# Altium PCB bldc_robot_main_adapter_board.PcbDoc
Units mm, origin at the board's own origin, x right, y up, seen from the top; angles counter-clockwise.
Board outline 100 x 40 mm, 2 copper layers (Top Layer, Bottom Layer), stack 1.571 mm thick; 51 components, 41 nets, 502 pads, 269 vias.
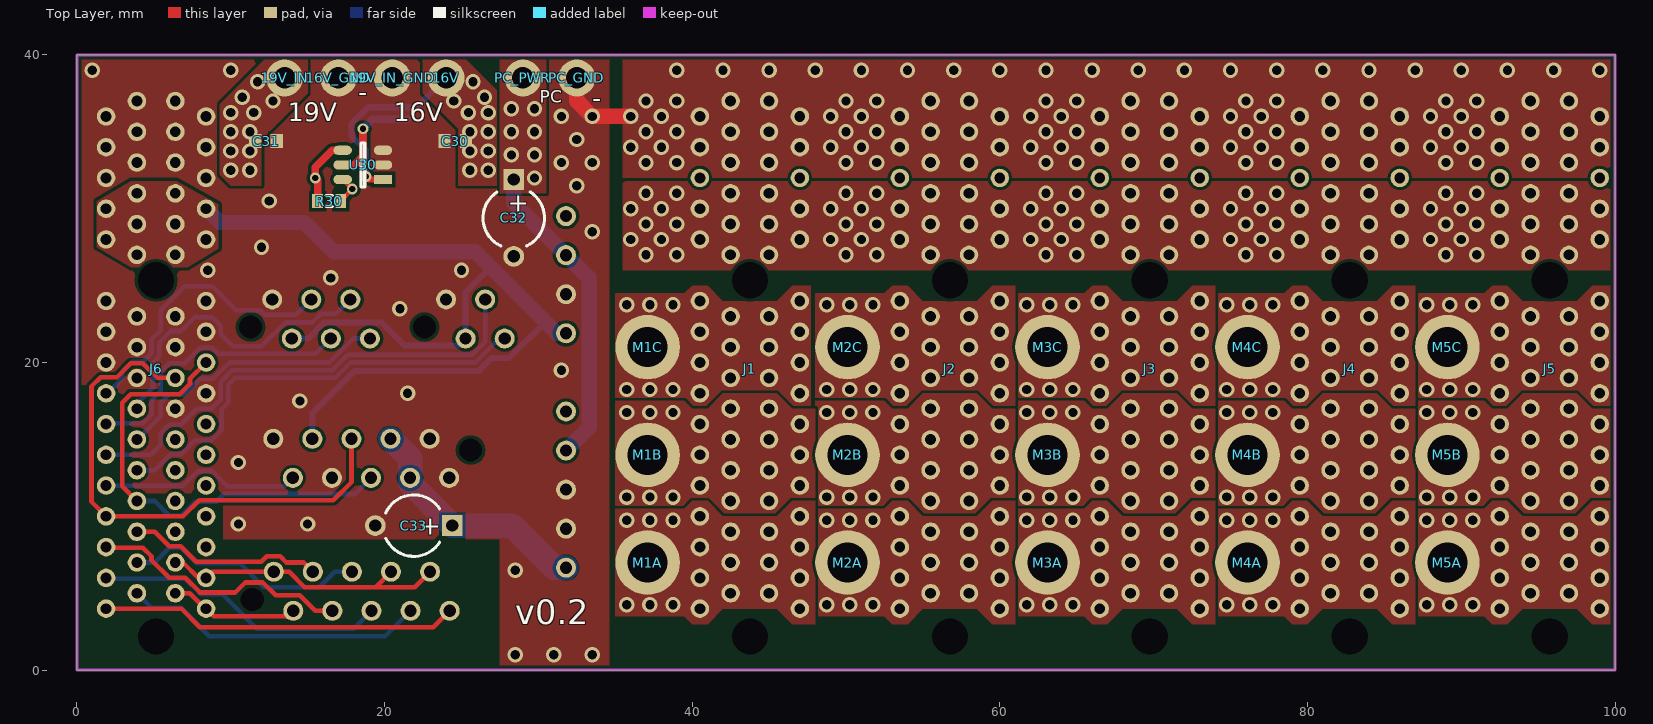
[diagram p0: Top Layer view]
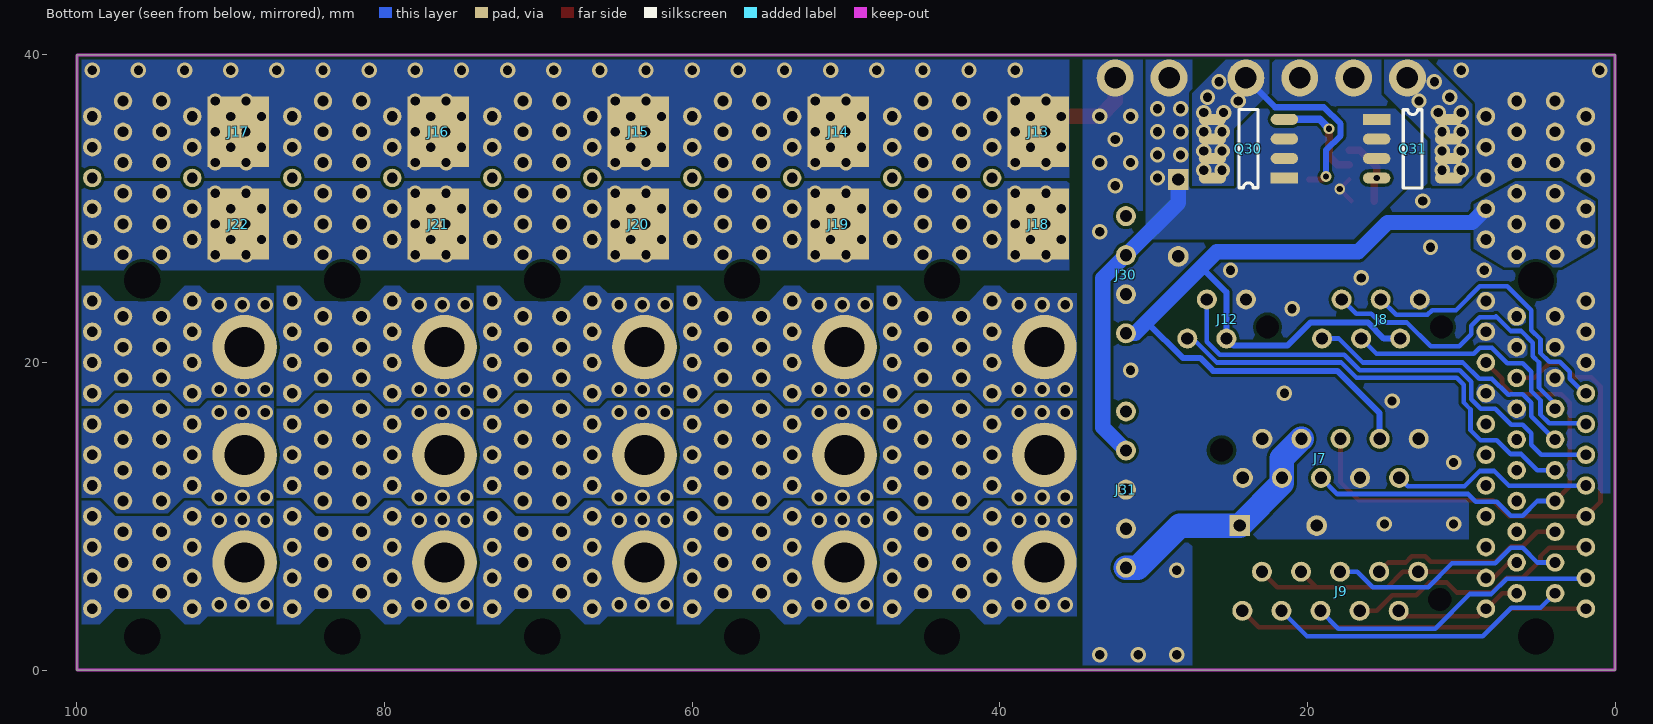
[diagram p1: Bottom Layer view, seen from below]
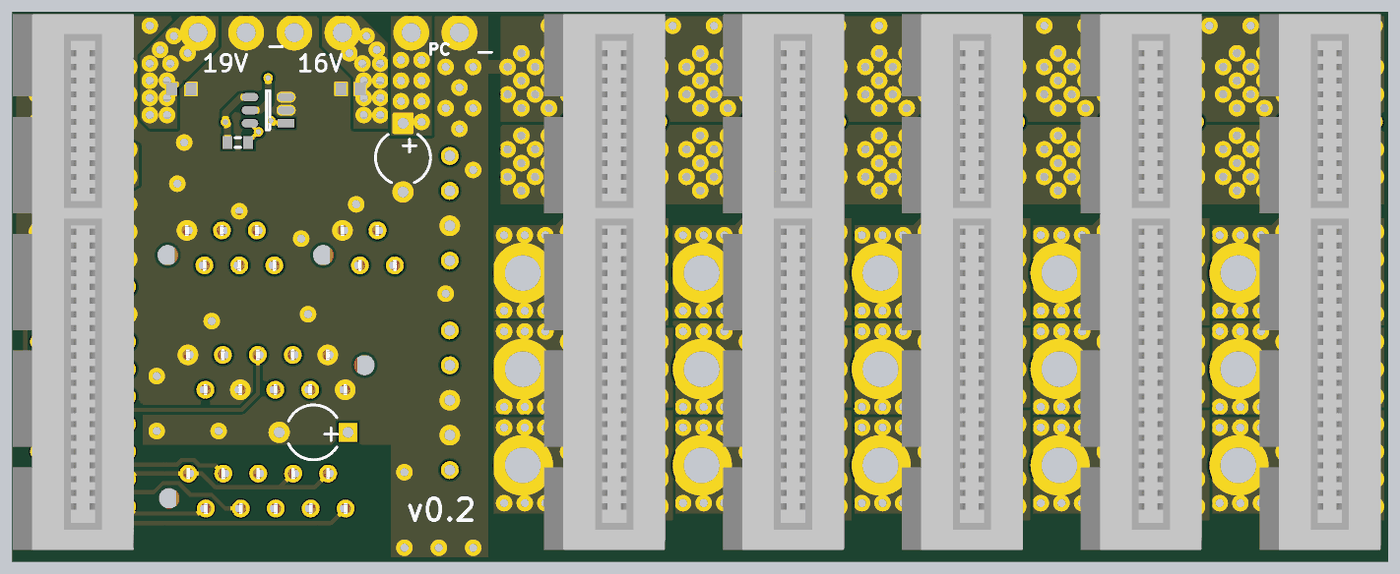
[diagram p2: 3D render of the assembled board from above, using the file's embedded part models]
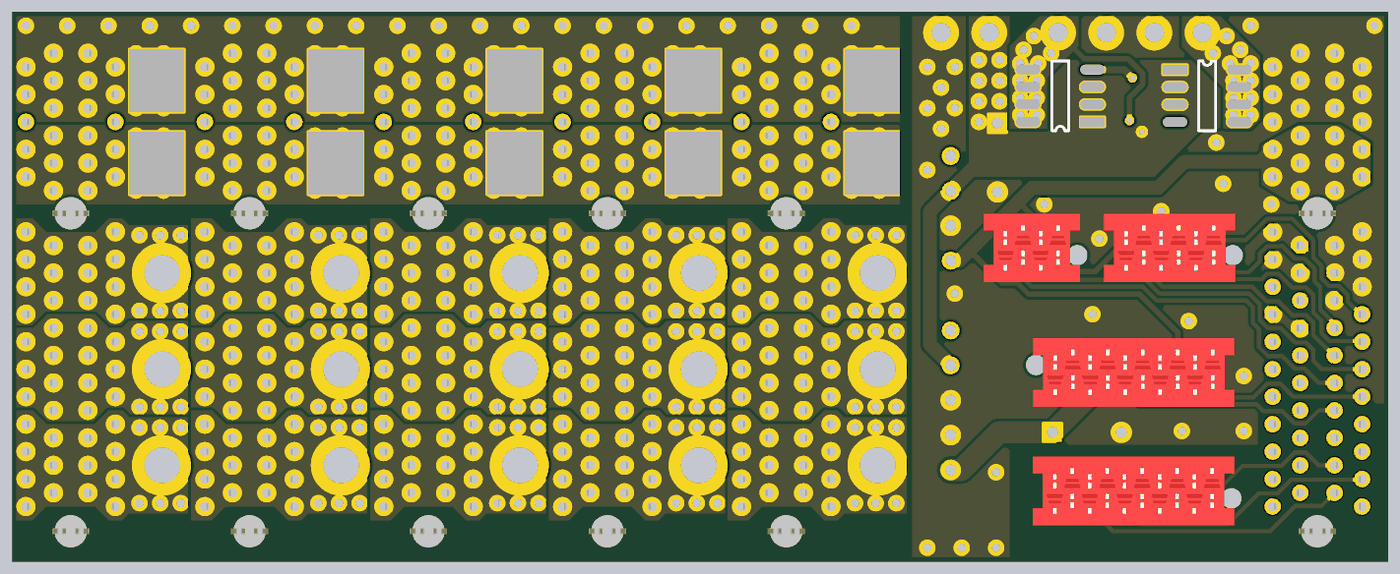
[diagram p3: 3D render of the assembled board from below, using the file's embedded part models]

## Layer stack, top to bottom
Top Solder: solder mask 0.0102, Solder Resist, Dk 3.5
Top Layer: signal copper 0.0356
Dielectric 1: dielectric 1.5, FR-4, Dk 4.8
Bottom Layer: signal copper 0.0356
Bottom Solder: solder mask 0.0102, Solder Resist, Dk 3.5

## Board outline
0,0 100,0 100,40 0,40

## Design rules (kind name [scope] priority, off if disabled: settings)
Clearance [All] p1: gap=0.2
Clearance ClearanceKeepOut [All vs OnLayer('Keep-Out Layer')] p2: gap=0.1
ComponentClearance [All] p1: gap=0.2 collisioncheckmode=3 verticalgap=0.2 showdistances=FALSE
HoleSize [All] p1: absolutevalues=TRUE maxlimit=5 minlimit=0.3 maxpercent=80.000 minpercent=20.000
PolygonConnect [All] p1: connectstyle=Direct reliefconductorwidth=0.254 reliefentries=4 polygonreliefangle="90 Angle" airgapwidth=0.254
RoomDefinition bldc_robot_main_adapter_board [InComponentClass('bldc_robot_main_adapter_board')] p1: confinementstyle=ConfineIn formatcopy=TRUE lockcomponents=FALSE outline 0,0 100,0 100,40 0,40
RoutingVias [All] p1: holewidth=0.5 width=0.8 viastyle="Through Hole" minholewidth=0.3 minwidth=0.7 maxholewidth=2 maxwidth=3
SolderMaskExpansion SolderMaskExpansionVia [IsVia] p1: expansion=-1
SolderMaskExpansion [All] p2: expansion=0.1
Width [All] p1: maxlimit=5 minlimit=0.2 preferedwidth=0.3
28 further rules are at their usual default settings.

## Components (designator, comment, footprint, x,y, rotation, side; value= is the part's Value field where it differs from the comment)
16V "HEADER-1" POWER-VIA 24,38.5 r270 top
16V_GND "HEADER-1" POWER-VIA 17,38.5 r0 top
19V_IN "HEADER-1" POWER-VIA 13.5,38.5 r0 top
19V_IN_GND "HEADER-1" POWER-VIA 20.5,38.5 r0 top
C30 "100nF" 1608[0603] 24.6,34.4 r180 top
C31 "100nF" 1608[0603] 12.3,34.4 r0 top
C32 "470uF" CAPR5-4X5 28.4,29.4 r270 top
C33 "470uF" CAPR5-4X5 21.9,9.4 r180 top
J1 "PCI-EXPRESS-X4" PCI-EXPRESS-X4-SOCKET 45,37 r270 top
J2 "PCI-EXPRESS-X4" PCI-EXPRESS-X4-SOCKET 58,37 r270 top
J3 "PCI-EXPRESS-X4" PCI-EXPRESS-X4-SOCKET 71,37 r270 top
J4 "PCI-EXPRESS-X4" PCI-EXPRESS-X4-SOCKET 84,37 r270 top
J5 "PCI-EXPRESS-X4" PCI-EXPRESS-X4-SOCKET 97,37 r270 top
J6 "PCI-EXPRESS-X4" PCI-EXPRESS-X4-SOCKET 6.4,37 r270 top
J7 "DRIBBLER" MICRO-MATCH-10 24.2,12.5 r0 bottom
J8 "IMU" MICRO-MATCH-6 12.7,24.1 r180 bottom
J9 "COIL" MICRO-MATCH-10 12.8,6.4 r180 bottom
J12 "ERF" MICRO-MATCH-4 24,24.1 r180 bottom
J13 "GND_PAD" POWER-PAD 37.5,35 r180 bottom
J14 "GND_PAD" POWER-PAD 50.5,35 r180 bottom
J15 "GND_PAD" POWER-PAD 63.5,35 r180 bottom
J16 "GND_PAD" POWER-PAD 76.5,35 r180 bottom
J17 "GND_PAD" POWER-PAD 89.5,35 r180 bottom
J18 "16V_PAD" POWER-PAD 37.5,29 r180 bottom
J19 "16V_PAD" POWER-PAD 50.5,29 r180 bottom
J20 "16V_PAD" POWER-PAD 63.5,29 r180 bottom
J21 "16V_PAD" POWER-PAD 76.5,29 r180 bottom
J22 "16V_PAD" POWER-PAD 89.5,29 r180 bottom
J30 "D24V5F5" PIN-HEADER-4 31.8,29.52 r270 bottom
J31 "D24V25F7" PIN-HEADER-5 31.8,16.82 r270 bottom
M1A "HEADER-1" 2MM-BULLET-VIA 37.1,7 r180 top
M1B "HEADER-1" 2MM-BULLET-VIA 37.1,14 r180 top
M1C "HEADER-1" 2MM-BULLET-VIA 37.1,21 r180 top
M2A "HEADER-1" 2MM-BULLET-VIA 50.1,7 r180 top
M2B "HEADER-1" 2MM-BULLET-VIA 50.1,14 r180 top
M2C "HEADER-1" 2MM-BULLET-VIA 50.1,21 r180 top
M3A "HEADER-1" 2MM-BULLET-VIA 63.1,7 r180 top
M3B "HEADER-1" 2MM-BULLET-VIA 63.1,14 r180 top
M3C "HEADER-1" 2MM-BULLET-VIA 63.1,21 r180 top
M4A "HEADER-1" 2MM-BULLET-VIA 76.1,7 r180 top
M4B "HEADER-1" 2MM-BULLET-VIA 76.1,14 r180 top
M4C "HEADER-1" 2MM-BULLET-VIA 76.1,21 r180 top
M5A "HEADER-1" 2MM-BULLET-VIA 89.1,7 r180 top
M5B "HEADER-1" 2MM-BULLET-VIA 89.1,14 r180 top
M5C "HEADER-1" 2MM-BULLET-VIA 89.1,21 r180 top
PC_GND "HEADER-1" POWER-VIA 32.5,38.5 r90 top
PC_PWR "HEADER-1" POWER-VIA 29,38.5 r90 top
Q30 "PMOS" SO8 21.5,32 r0 bottom
Q31 "PMOS" SO8 15.5,35.8 r180 bottom
R30 "470k" J1-0603 16.4,30.5 r0 top
U30 "LTC4412" TSOT-23-6 19.9,31.9 r180 top

## Footprints (in the part's own frame and the unit in brackets; to place one, negate y for a bottom-side part, rotate by r counter-clockwise, add the part's x,y. Pads: shape width x height; smd on the part's side, far side on the other; paste and mask are expansions set on the pad)
2MM-BULLET-VIA [mm]
  round 4.2 hole 2.6: 1(0,0)
1608[0603] [mm] "Chip Capacitor, Body 1.6x0.8mm, IPC High Density"
  rect 0.8x0.9 smd: 1(-0.7,0) 2(0.7,0)
  body extent -0.87,-0.48 0.87,0.48, height 1.3
CAPR5-4X5 [mm] "Capacitor; 2 Leads"
  rect 1.35x1.35 hole 0.8: 1(-2.5,0)
  round 1.35 hole 0.8: 2(2.5,0)
  silkscreen extent -1.69,-2 1.82,2
J1-0603 [mm] "Chip Resistor, Body 1.6x0.8mm, IPC High Density"
  rect 0.7x0.9 smd: 1(-0.75,0) 2(0.75,0)
  silkscreen extent -0.2,-0.35 0.2,0.35, body extent -0.85,-0.48 0.85,0.48, height 0.9
MICRO-MATCH-4 [mm]
  round 1.3 hole 0.8: 1(0,0) 2(-1.27,-2.54) 3(-2.54,0) 4(-3.81,-2.54)
  round 0 hole 1.5 unplated: drill(1.4,-1.8)
  body extent -5.41,-3.77 1.6,1.23, height 4
MICRO-MATCH-6 [mm]
  round 1.3 hole 0.8: 1(0,0) 2(-1.27,-2.54) 3(-2.54,0) 4(-3.81,-2.54) 5(-5.08,0) 6(-6.35,-2.54)
  round 0 hole 1.5 unplated: drill(1.4,-1.8)
  body extent -7.95,-3.77 1.6,1.23, height 4
MICRO-MATCH-10 [mm]
  round 1.3 hole 0.8: 1(0,0) 2(-1.27,-2.54) 3(-2.54,0) 4(-3.81,-2.54) 5(-5.08,0) 6(-6.35,-2.54) 7(-7.62,0) 8(-8.89,-2.54) 9(-10.16,0) 10(-11.43,-2.54)
  round 0 hole 1.5 unplated: drill(1.4,-1.8)
  body extent -13.03,-3.77 1.6,1.23, height 4
PCI-EXPRESS-X4-SOCKET [mm]
  round 0 hole 2.35 unplated: 0(11.65,-1.25) 1(34.8,-1.25)
  round 1.2 hole 0.7: A1(0,0) A2(1,2) A3(2,0) A4(3,2) A5(4,0) A6(5,2) A7(6,0) A8(7,2) A9(8,0) A10(9,2) A11(10,0) A12(13,2) A13(14,0) A14(15,2) A15(16,0) A16(17,2) A17(18,0) A18(19,2) A19(20,0) A20(21,2) A21(22,0) A22(23,2) A23(24,0) A24(25,2) A25(26,0) A26(27,2) A27(28,0) A28(29,2) A29(30,0) A30(31,2) A31(32,0) A32(33,2) B1(0,-2.5) B2(1,-4.5) B3(2,-2.5) B4(3,-4.5) B5(4,-2.5) B6(5,-4.5) B7(6,-2.5) B8(7,-4.5) B9(8,-2.5) B10(9,-4.5) B11(10,-2.5) B12(13,-4.5) B13(14,-2.5) B14(15,-4.5) B15(16,-2.5) B16(17,-4.5) B17(18,-2.5) B18(19,-4.5) B19(20,-2.5) B20(21,-4.5) B21(22,-2.5) B22(23,-4.5) B23(24,-2.5) B24(25,-4.5) B25(26,-2.5) B26(27,-4.5) B27(28,-2.5) B28(29,-4.5) B29(30,-2.5) B30(31,-4.5) B31(32,-2.5) B32(33,-4.5)
  body extent -2.85,-6.35 36.15,2.45, height 11.01
PIN-HEADER-4 [mm]
  round 1.3 hole 0.8: 1(0,0) 2(2.54,0) 3(5.08,0) 4(7.62,0)
PIN-HEADER-5 [mm]
  round 1.3 hole 0.8: 1(0,0) 2(2.54,0) 3(5.08,0) 4(7.62,0) 5(10.16,0)
POWER-PAD [mm]
  rect 4x4.6 smd: 1(0,0)
POWER-VIA [mm]
  round 2.4 hole 1.4: 1(0,0)
SO8 [mm]
  rect 1.78x0.72 smd: 1(0,0)
  oval 1.78x0.72 smd: 2(0,-1.27) 3(0,-2.54) 4(0,-3.81) 5(4.68,-3.81) 6(4.68,-2.54) 7(4.68,-1.27) 8(4.68,0)
  silkscreen extent 1.72,-4.44 2.96,0.64
TSOT-23-6 [mm]
  rect 1.2x0.6 smd: 1(0,0)
  oval 1.2x0.6 smd: 2(0,-0.95) 3(0,-1.9) 4(2.62,-1.9) 5(2.62,-0.95) 6(2.62,0)
  silkscreen extent 1.19,-2.38 1.43,0.48

## Part data
C30 C31: library part "Cap Semi", "Capacitor (Semiconductor SIM Model)"
C32 C33: library part Cap2, "Capacitor"
J7 J9: library part HEADER-10
J8: library part HEADER-6
J12 J30: library part HEADER-4
J13 J14 J15 J16 J17 J18 J19 J20 J21 J22: library part HEADER-1
J31: library part HEADER-5
R30: library part Res3, "Resistor"

## Via types
v1: diameter 1, hole 0.6, Top Layer to Bottom Layer, 265 vias
v2: diameter 0.7, hole 0.4, Top Layer to Bottom Layer, 4 vias

## Nets (pads, with @x,y where several pads share a name; then routed paths per layer and width w, separated by ;. In a path a pad name is that pad's centre, name@x,y a point inside that pad or via, vN(x,y) a via of type N, cw(c..) or ccw(c..) an arc to the next point about the centre after c; other vN are vias at no path point)
5V: J6.A7 J6.A8 J6.A9 J6.A10 J6.A11 J6.B7 J6.B8 J6.B9 J6.B10 J6.B11 J7.8 J8.2 J12.2 J30.4 | length 63.9
  Bottom Layer w0.4: J8.2 15.025,21.56 16.075,22.61 19.8,22.61 21.31,21.1 24.81,21.1 J12.2 25.27,24.57 26.9,26.2 ; J7.8 15.31,16.71 18.05,19.45 26.128,19.45 26.978,20.3 28.1,20.3 30.4,22.6 30.5,22.6
  Bottom Layer w1: J6.A8 9.3,29.1 14.8,29.1 16.7,27.2 25.9,27.2 26.9,26.2 30.5,22.6 31.2,21.9 J30.4
5V_COIL: J6.A31 J6.A32 J9.2 | length 8.4
  Top Layer w0.3: J6.A31 7.349,5 8.349,4 J6.A32 8.9,3.5 13.71,3.5 J9.2
7.5V: C33.1 J7.3 J7.4 J31.5 | length 15.8
  Bottom Layer w1.6: J7.4 21.66,13.77 J7.3 21.66,12.14 C33.1 28.3,9.4 31.04,6.66 J31.5
16V: J1.A7 J1.A8 J1.A9 J1.A10 J1.A11 J1.B7 J1.B8 J1.B9 J1.B10 J1.B11 J2.A7 J2.A8 J2.A9 J2.A10 J2.A11 J2.B7 J2.B8 J2.B9 J2.B10 J2.B11 J3.A7 J3.A8 J3.A9 J3.A10 J3.A11 J3.B7 J3.B8 J3.B9 J3.B10 J3.B11 J4.A7 J4.A8 J4.A9 J4.A10 J4.A11 J4.B7 J4.B8 J4.B9 J4.B10 J4.B11 J5.A7 J5.A8 J5.A9 J5.A10 J5.A11 J5.B7 J5.B8 J5.B9 J5.B10 J5.B11 J18.1 J19.1 J20.1 J21.1 J22.1
  other v1: 37,27 39,27 50,27 52,27 63,27 65,27 76,27 78,27 89,27 91,27 36,28 38,28 49,28 51,28 62,28 64,28 75,28 77,28 88,28 90,28 37,29 39,29 50,29 52,29 63,29 65,29 76,29 78,29 89,29 91,29 36,30 38,30 49,30 51,30 62,30 64,30 75,30 77,30 88,30 90,30 37,31 39,31 50,31 52,31 63,31 65,31 76,31 78,31 89,31 91,31
16V_PC: C32.1 J30.2 J31.2 PC_PWR.1 Q30.1 Q30.2 Q30.3 Q31.1 Q31.2 Q31.3 R30.2 U30.6 | length 22.2
  Top Layer w0.3: R30.2 17.15,30.53 v2(17.9,31.28) U30.6
  Bottom Layer w1: C32.1 28.4,30.38 J30.2 33.3,25.48 33.3,15.78 J31.2
  other v1: 29.75,32 28.25,33.5 29.75,33.5 28.25,35 29.75,35 28.25,36.5 29.75,36.5
BALL_SENS: J6.B24 J7.9 | length 13.2
  Bottom Layer w0.3: J6.B24 6.9,12 7.85,12.95 8.793,12.95 9.794,11.95 13.49,11.95 J7.9
CHARGE: J6.B29 J9.5 | length 15.8
  Bottom Layer w0.3: J6.B29 5.056,7 6.006,7.95 6.793,7.95 7.793,6.95 10.606,6.95 12.156,5.4 15.754,5.4 16.754,6.4 J9.5
CS: J6.B21 J8.6 | length 18.4
  Bottom Layer w0.3: J6.B21 3.951,15 5.45,16.499 5.45,17.394 6.006,17.95 6.793,17.95 6.843,17.9 6.956,17.9 8.006,18.95 8.843,18.95 9.893,20 16.4,20 17.96,21.56 J8.6
DONE: J6.B30 J9.6 | length 19.1
  Bottom Layer w0.3: J6.B30 1.95,5.95 7.05,5.95 8.05,4.95 9.45,4.95 11.7,2.7 17.99,2.7 J9.6
GND: 16V_GND.1 19V_IN_GND.1 C30.2 C31.2 C32.2 C33.2 J1.A1 J1.A2 J1.A3 J1.A4 J1.A5 J1.B1 J1.B2 J1.B3 J1.B4 J1.B5 J2.A1 J2.A2 J2.A3 J2.A4 J2.A5 J2.B1 J2.B2 J2.B3 J2.B4 J2.B5 J3.A1 J3.A2 J3.A3 J3.A4 J3.A5 J3.B1 J3.B2 J3.B3 J3.B4 J3.B5 J4.A1 J4.A2 J4.A3 J4.A4 J4.A5 J4.B1 J4.B2 J4.B3 J4.B4 J4.B5 J5.A1 J5.A2 J5.A3 J5.A4 J5.A5 J5.B1 J5.B2 J5.B3 J5.B4 J5.B5 J6.A1 J6.A2 J6.A3 J6.A4 J6.A5 J6.A6 J6.A12 J6.A13 J6.A14 J6.A15 J6.A18 J6.A19 J6.B1 J6.B2 J6.B3 J6.B4 J6.B5 J6.B6 J6.B12 J6.B13 J6.B14 J6.B15 J6.B16 J6.B17 J7.1 J7.2 J7.7 J7.10 J8.1 J12.1 J13.1 J14.1 J15.1 J16.1 J17.1 J30.3 J31.3 J31.4 PC_GND.1 U30.2 U30.3 | length 5.4
  Top Layer w1: PC_GND.1 32.5,37 v1(33.5,36) v1(36,36)
  other v1: 28.5,1 31,1 33.5,1 28.5,6.5 10.5,9.5 15,9.5 10.5,13.5 14.5,17.5 21.5,18 31.5,19.5 21,23.5 16.5,25.5 8.5,26 25,26 12,27.5 33.5,28.5 12.5,30.5 32.5,31.5 31.5,33 33.5,33 37,33 39,33 50,33 52,33 63,33 65,33 76,33 78,33 89,33 91,33 36,34 38,34 49,34 51,34 62,34 64,34 75,34 77,34 88,34 90,34 32.5,34.5 37,35 39,35 50,35 52,35 63,35 65,35 76,35 78,35 89,35 91,35 31.5,36 38,36 49,36 51,36 62,36 64,36 75,36 77,36 88,36 90,36 37,37 39,37 50,37 52,37 63,37 65,37 76,37 78,37 89,37 91,37 1,39 10,39 39,39 42,39 45,39 48,39 51,39 54,39 57,39 60,39 63,39 66,39 69,39 72,39 75,39 78,39 81,39 84,39 87,39 90,39 93,39 96,39 99,39
GND_COIL: J6.A29 J6.A30 J9.1 J9.7 J9.9 | length 19.9
  Top Layer w0.3: J6.A29 6.9,7 7.9,6 J6.A30 8.8,6.4 J9.1 ; J9.1@12.454,6.054 J9.1 ; J9.7 19.42,5.4 ; J9.9 21.96,5.4 19.42,5.4 ; J9.1 13.8,6.4 14.8,5.4 19.42,5.4
KICK1: J6.B27 J9.3 | length 12.8
  Top Layer w0.3: J6.B27 5.056,9 6.006,8.05 6.75,8.05 7.75,7.05 11.986,7.05 12.336,7.4 13.214,7.4 13.614,7 14.74,7 J9.3
KICK2: J6.B28 J9.4 | length 17.1
  Top Layer w0.3: J6.B28 1.95,7.95 4.293,7.95 4.85,7.394 4.85,7.15 6,6 7.056,6 8.006,5.05 10.294,5.05 10.944,5.7 12.086,5.7 12.926,4.86 14.484,4.86 15.484,3.86 J9.4
M1A: J1.A26 J1.A27 J1.A28 J1.A29 J1.A30 J1.A31 J1.A32 J1.B26 J1.B27 J1.B28 J1.B29 J1.B30 J1.B31 J1.B32 M1A.1
  other v1: 35.75,4.25 37.25,4.25 38.75,4.25 35.75,9.75 37.25,9.75 38.75,9.75
M1B: J1.A19 J1.A20 J1.A21 J1.A22 J1.A23 J1.A24 J1.A25 J1.B19 J1.B20 J1.B21 J1.B22 J1.B23 J1.B24 J1.B25 M1B.1
  other v1: 35.75,11.25 37.25,11.25 38.75,11.25 35.75,16.75 37.25,16.75 38.75,16.75
M1C: J1.A12 J1.A13 J1.A14 J1.A15 J1.A16 J1.A17 J1.A18 J1.B12 J1.B13 J1.B14 J1.B15 J1.B16 J1.B17 J1.B18 M1C.1
  other v1: 35.75,18.25 37.25,18.25 38.75,18.25 35.75,23.75 37.25,23.75 38.75,23.75
M2A: J2.A26 J2.A27 J2.A28 J2.A29 J2.A30 J2.A31 J2.A32 J2.B26 J2.B27 J2.B28 J2.B29 J2.B30 J2.B31 J2.B32 M2A.1
  other v1: 48.75,4.25 50.25,4.25 51.75,4.25 48.75,9.75 50.25,9.75 51.75,9.75
M2B: J2.A19 J2.A20 J2.A21 J2.A22 J2.A23 J2.A24 J2.A25 J2.B19 J2.B20 J2.B21 J2.B22 J2.B23 J2.B24 J2.B25 M2B.1
  other v1: 48.75,11.25 50.25,11.25 51.75,11.25 48.75,16.75 50.25,16.75 51.75,16.75
M2C: J2.A12 J2.A13 J2.A14 J2.A15 J2.A16 J2.A17 J2.A18 J2.B12 J2.B13 J2.B14 J2.B15 J2.B16 J2.B17 J2.B18 M2C.1
  other v1: 48.75,18.25 50.25,18.25 51.75,18.25 48.75,23.75 50.25,23.75 51.75,23.75
M3A: J3.A26 J3.A27 J3.A28 J3.A29 J3.A30 J3.A31 J3.A32 J3.B26 J3.B27 J3.B28 J3.B29 J3.B30 J3.B31 J3.B32 M3A.1
  other v1: 61.75,4.25 63.25,4.25 64.75,4.25 61.75,9.75 63.25,9.75 64.75,9.75
M3B: J3.A19 J3.A20 J3.A21 J3.A22 J3.A23 J3.A24 J3.A25 J3.B19 J3.B20 J3.B21 J3.B22 J3.B23 J3.B24 J3.B25 M3B.1
  other v1: 61.75,11.25 63.25,11.25 64.75,11.25 61.75,16.75 63.25,16.75 64.75,16.75
M3C: J3.A12 J3.A13 J3.A14 J3.A15 J3.A16 J3.A17 J3.A18 J3.B12 J3.B13 J3.B14 J3.B15 J3.B16 J3.B17 J3.B18 M3C.1
  other v1: 61.75,18.25 63.25,18.25 64.75,18.25 61.75,23.75 63.25,23.75 64.75,23.75
M4A: J4.A26 J4.A27 J4.A28 J4.A29 J4.A30 J4.A31 J4.A32 J4.B26 J4.B27 J4.B28 J4.B29 J4.B30 J4.B31 J4.B32 M4A.1
  other v1: 74.75,4.25 76.25,4.25 77.75,4.25 74.75,9.75 76.25,9.75 77.75,9.75
M4B: J4.A19 J4.A20 J4.A21 J4.A22 J4.A23 J4.A24 J4.A25 J4.B19 J4.B20 J4.B21 J4.B22 J4.B23 J4.B24 J4.B25 M4B.1
  other v1: 74.75,11.25 76.25,11.25 77.75,11.25 74.75,16.75 76.25,16.75 77.75,16.75
M4C: J4.A12 J4.A13 J4.A14 J4.A15 J4.A16 J4.A17 J4.A18 J4.B12 J4.B13 J4.B14 J4.B15 J4.B16 J4.B17 J4.B18 M4C.1
  other v1: 74.75,18.25 76.25,18.25 77.75,18.25 74.75,23.75 76.25,23.75 77.75,23.75
M5A: J5.A26 J5.A27 J5.A28 J5.A29 J5.A30 J5.A31 J5.A32 J5.B26 J5.B27 J5.B28 J5.B29 J5.B30 J5.B31 J5.B32 M5A.1
  other v1: 87.75,4.25 89.25,4.25 90.75,4.25 87.75,9.75 89.25,9.75 90.75,9.75
M5B: J5.A19 J5.A20 J5.A21 J5.A22 J5.A23 J5.A24 J5.A25 J5.B19 J5.B20 J5.B21 J5.B22 J5.B23 J5.B24 J5.B25 M5B.1
  other v1: 87.75,11.25 89.25,11.25 90.75,11.25 87.75,16.75 89.25,16.75 90.75,16.75
M5C: J5.A12 J5.A13 J5.A14 J5.A15 J5.A16 J5.A17 J5.A18 J5.B12 J5.B13 J5.B14 J5.B15 J5.B16 J5.B17 J5.B18 M5C.1
  other v1: 87.75,18.25 89.25,18.25 90.75,18.25 87.75,23.75 89.25,23.75 90.75,23.75
Net16V_1: 16V.1 C30.1 Q30.5 Q30.6 Q30.7 Q30.8 U30.1 | length 12.4
  Top Layer w0.4: v2(18.8,32.1) 19,31.9 U30.1
  Bottom Layer w0.4: v2(18.8,32.1) 18.8,33.8 17.85,34.75 17.85,35.511 18.939,36.6 22.1,36.6 16V.1
  other v1: 25.55,32.5 26.75,32.5 25.55,33.75 26.75,33.75 25.55,35 26.75,35 25.45,36.25 26.75,36.25 24.5,37 26.5,37.25 25.75,38.25
Net19V_IN_1: 19V_IN.1 C31.1 Q31.5 Q31.6 Q31.7 Q31.8
  other v1: 10,32.5 11.25,32.5 10,33.75 11.25,33.75 10,35 11.25,35 10,36.25 11.5,36.25 12.75,37 10.75,37.25 11.75,38.25
NetQ30_4: Q30.4 U30.5 | length 6.5
  Top Layer w0.5: U30.5 18.05,32.85 18.6,33.4 v2(18.6,35.2)
  Bottom Layer w0.5: v2(18.6,35.2) 19.21,35.81 Q30.4
NetQ31_4: Q31.4 R30.1 U30.4 | length 4.5
  Top Layer w0.5: R30.1 15.65,31.84 v2(15.5,31.99) 15.5,32.7 16.6,33.8 U30.4
RX: J6.B23 J12.4 | length 28.9
  Bottom Layer w0.3: J6.B23 5.056,13 6.106,14.05 6.793,14.05 7.693,14.95 8.75,14.95 9.4,15.6 9.4,16.949 9.85,17.399 9.85,18.543 10.307,19 16.814,19 17.814,20 25.9,20 27.46,21.56 J12.4
SCL2: J6.B31 J9.8 | length 19.6
  Bottom Layer w0.3: J6.B31 4.85,4.05 6.75,4.05 8.6,2.2 20.03,2.2 J9.8
SCLK: J6.B18 J8.3 | length 18.9
  Bottom Layer w0.3: J6.B18 2,18 2.95,18.95 2.95,19.394 3.606,20.05 4.293,20.05 4.85,20.606 4.85,21.501 5.45,22.101 5.45,23.394 7.006,24.95 8.793,24.95 10.343,23.4 11.9,23.4 12.2,23.1 14.24,23.1 J8.3
SDA2: J6.B32 J9.10 | length 23.3
  Top Layer w0.3: J6.B32 6.8,4 8,2.8 23.17,2.8 J9.10
SDI: J6.B20 J8.4 | length 18.5
  Bottom Layer w0.3: J6.B20 1.95,16.05 4.293,16.05 4.85,16.606 4.85,17.55 5.45,18.15 5.45,19.394 6.006,19.95 7.006,19.95 8.006,20.95 8.793,20.95 9.183,20.56 15.51,20.56 J8.4
SDO: J6.B19 J8.5 | length 20.4
  Bottom Layer w0.3: J6.B19 3.9,17.307 4.95,18.357 4.95,19.999 5.35,20.399 5.35,21.294 6.106,22.05 6.793,22.05 7.743,23 7.793,22.95 8.793,22.95 9.35,22.394 9.35,21.85 10.14,21.06 11.997,21.06 13.537,22.6 15.287,22.6 15.847,23.16 16.84,23.16 J8.5
SERVO1: J6.A16 J6.B25 J7.5 | length 30.1
  Top Layer w0.3: J6.B25 2.95,11.95 2.95,17.394 3.506,17.95 6.693,17.95 7.35,18.606 7.35,18.95 J6.A16
  Bottom Layer w0.3: J6.B25 5.056,11 6.006,10.05 6.793,10.05 7.693,10.95 9.05,10.95 9.55,11.45 18.07,11.45 J7.5
SERVO2: J6.A17 J6.B26 J7.6 | length 35
  Top Layer w0.3: J6.A17 5.243,19 4.293,19.95 3.506,19.95 2.606,19.05 1.55,19.05 0.95,18.45 0.95,10.95 J6.B26 6.9,10 7.95,11.05 16.67,11.05 17.85,12.23 J7.6
TX: J6.B22 J12.3 | length 31.5
  Bottom Layer w0.3: J6.B22 4.8,14 5.45,14.65 5.45,15.394 6.006,15.95 6.75,15.95 7.8,17 8.743,17 9.35,17.606 9.35,18.75 10.1,19.5 16.607,19.5 17.607,20.5 25.693,20.5 26.54,21.347 J12.3
pads on no net: J1.0 J1.1 J1.A6 J1.B6 J2.0 J2.1 J2.A6 J2.B6 J3.0 J3.1 J3.A6 J3.B6 J4.0 J4.1 J4.A6 J4.B6 J5.0 J5.1 J5.A6 J5.B6 J6.0 J6.1 J6.A20 J6.A21 J6.A22 J6.A23 J6.A24 J6.A25 J6.A26 J6.A27 J6.A28 J7.drill J8.drill J9.drill J12.drill J30.1 J31.1

## Polygon pours and split planes (outlines as drawn)
Net16V_1 on Top Layer "Top Layer-No Net" (solid, remove dead copper, pour order 92): 22.5,40 22.5,37.5 24.8,35.2 24.8,31.5 27.5,31.5 27.5,37.5 25,40
16V_PC on Top Layer "Top Layer-No Net 1" (solid, remove dead copper, pour order 45): 27.5,31 30.5,31 30.5,40 27.5,40
5V on Top Layer "Top Layer-5V" (solid, remove dead copper, pour order 93): 9.2,30.3 6.5,31.8 3.5,31.8 1.3,30.5 1.3,27.5 3.5,26.2 7.2,26.2 9.2,27.4
GND on Top Layer "Top Layer-No Net" (solid, remove dead copper, pour order 101): 0,40 34.6,40 34.6,0 27.5,0 27.5,8.5 9.5,8.5 9.5,11.5 0,11.5
Net19V_IN_1 on Top Layer "Top Layer-No Net" (solid, remove dead copper, pour order 90): 15,40 15,37.5 12,34.5 12,31.5 10,31.5 9.3,32.2 9.3,36.8 12.5,40
GND on Top Layer "Top Layer-No Net" (solid, remove dead copper, pour order 96): 35.5,40 35.5,32 100,32 100,40
16V on Top Layer "Top Layer-No Net" (solid, remove dead copper, pour order 99): 35.5,32 100,32 100,26 35.5,26
M1C on Top Layer "Top Layer-M1C" (solid, remove dead copper, pour order 104): 47.7,25 46.5,25 45.5,24 44.5,24 42,24 41,25 40,25 39.5,24.5 35,24.5 35,17.5 39.5,17.5 40,17 41,17 42,18 45.5,18 46.5,17 47.7,17
M1B on Top Layer "Top Layer-M1B" (solid, remove dead copper, pour order 103): 48,11 46.5,11 45.5,10 42,10 41,11 40,11 39.5,10.5 35,10.5 35,17.5 39.5,17.5 40,17 41,17 42,18 45.5,18 46.5,17 48,17
M1A on Top Layer "Top Layer-M1A" (solid, remove dead copper, pour order 102): 48,3 46.5,3 45.5,4 42,4 41,3 40,3 39.5,3.5 35,3.5 35,10.5 39.5,10.5 40,11 41,11 42,10 45.5,10 46.5,11 47.5,11 48,11
M2A on Top Layer "Top Layer-M2A" (solid, remove dead copper, pour order 105): 61,3 59.5,3 58.5,4 55,4 54,3 53,3 52.5,3.5 48,3.5 48,10.5 52.5,10.5 53,11 54,11 55,10 58.5,10 59.5,11 60.5,11 61,11
M2B on Top Layer "Top Layer-M2B" (solid, remove dead copper, pour order 106): 61,11 59.5,11 58.5,10 55,10 54,11 53,11 52.5,10.5 48,10.5 48,17.5 52.5,17.5 53,17 54,17 55,18 58.5,18 59.5,17 61,17
M2C on Top Layer "Top Layer-M2C" (solid, remove dead copper, pour order 107): 61,25 59.5,25 58.5,24 57.5,24 55,24 54,25 53,25 52.5,24.5 48,24.5 48,17.5 52.5,17.5 53,17 54,17 55,18 58.5,18 59.5,17 61,17
M3A on Top Layer "Top Layer-M3A" (solid, remove dead copper, pour order 108): 74,3 72.5,3 71.5,4 68,4 67,3 66,3 65.5,3.5 61,3.5 61,10.5 65.5,10.5 66,11 67,11 68,10 71.5,10 72.5,11 73.5,11 74,11
M3B on Top Layer "Top Layer-M3B" (solid, remove dead copper, pour order 109): 74,11 72.5,11 71.5,10 68,10 67,11 66,11 65.5,10.5 61,10.5 61,17.5 65.5,17.5 66,17 67,17 68,18 71.5,18 72.5,17 74,17
M3C on Top Layer "Top Layer-M3C" (solid, remove dead copper, pour order 110): 74,25 72.5,25 71.5,24 70.5,24 68,24 67,25 66,25 65.5,24.5 61,24.5 61,17.5 65.5,17.5 66,17 67,17 68,18 71.5,18 72.5,17 74,17
M4A on Top Layer "Top Layer-M4A" (solid, remove dead copper, pour order 111): 87,3 85.5,3 84.5,4 81,4 80,3 79,3 78.5,3.5 74,3.5 74,10.5 78.5,10.5 79,11 80,11 81,10 84.5,10 85.5,11 86.5,11 87,11
M4B on Top Layer "Top Layer-M4B" (solid, remove dead copper, pour order 112): 87,11 85.5,11 84.5,10 81,10 80,11 79,11 78.5,10.5 74,10.5 74,17.5 78.5,17.5 79,17 80,17 81,18 84.5,18 85.5,17 87,17
M4C on Top Layer "Top Layer-M4C" (solid, remove dead copper, pour order 113): 87,25 85.5,25 84.5,24 83.5,24 81,24 80,25 79,25 78.5,24.5 74,24.5 74,17.5 78.5,17.5 79,17 80,17 81,18 84.5,18 85.5,17 87,17
M5A on Top Layer "Top Layer-M5A" (solid, remove dead copper, pour order 114): 100,3 98.5,3 97.5,4 94,4 93,3 92,3 91.5,3.5 87,3.5 87,10.5 91.5,10.5 92,11 93,11 94,10 97.5,10 98.5,11 99.5,11 100,11
M5B on Top Layer "Top Layer-M5B" (solid, remove dead copper, pour order 115): 100,11 98.5,11 97.5,10 94,10 93,11 92,11 91.5,10.5 87,10.5 87,17.5 91.5,17.5 92,17 93,17 94,18 97.5,18 98.5,17 100,17
M5C on Top Layer "Top Layer-M5C" (solid, remove dead copper, pour order 116): 100,25 98.5,25 97.5,24 96.5,24 94,24 93,25 92,25 91.5,24.5 87,24.5 87,17.5 91.5,17.5 92,17 93,17 94,18 97.5,18 98.5,17 100,17
Net16V_1 on Bottom Layer "Top Layer-No Net" (solid, remove dead copper, pour order 91): 22.5,40 22.5,37.5 24.8,35.2 24.8,31.5 27.5,31.5 27.5,37.5 25,40
GND on Bottom Layer "Top Layer-No Net 1" (solid, remove dead copper, pour order 98): 0,11.5 9.5,11.5 9.5,8.5 27.5,8.5 27.5,0 34.6,0 34.6,40 0,40
M1A on Bottom Layer "Top Layer-M1A" (solid, remove dead copper, pour order 117): 35,3.5 35,10.5 39.5,10.5 40,11 41,11 42,10 45.5,10 46.5,11 48,11 48,3 46.5,3 45.5,4 42,4 41,3 40,3 39.5,3.5
M5C on Bottom Layer "Top Layer-M5C" (solid, remove dead copper, pour order 131): 87,17.5 87,24.5 91.5,24.5 92,25 93,25 94,24 97.5,24 98.5,25 100,25 100,17 98.5,17 97.5,18 94,18 93,17 92,17 91.5,17.5
M5B on Bottom Layer "Top Layer-M5B" (solid, remove dead copper, pour order 130): 87,10.5 87,17.5 91.5,17.5 92,17 93,17 94,18 97.5,18 98.5,17 100,17 100,11 98.5,11 97.5,10 94,10 93,11 92,11 91.5,10.5
M5A on Bottom Layer "Top Layer-M5A" (solid, remove dead copper, pour order 129): 87,3.5 87,10.5 91.5,10.5 92,11 93,11 94,10 97.5,10 98.5,11 100,11 100,3 98.5,3 97.5,4 94,4 93,3 92,3 91.5,3.5 87,3.5
M4C on Bottom Layer "Top Layer-M4C" (solid, remove dead copper, pour order 128): 74,17.5 78.5,17.5 79,17 80,17 81,18 84.5,18 85.5,17 87,17 87,25 85.5,25 84.5,24 81,24 80,25 79,25 78.5,24.5 74,24.5
M4B on Bottom Layer "Top Layer-M4B" (solid, remove dead copper, pour order 127): 74,10.5 74,17.5 78.5,17.5 79,17 80,17 81,18 84.5,18 85.5,17 87,17 87,11 85.5,11 84.5,10 81,10 80,11 79,11 78.5,10.5
M4A on Bottom Layer "Top Layer-M4A" (solid, remove dead copper, pour order 126): 74,3.5 78.5,3.5 79,3 80,3 81,4 84.5,4 85.5,3 87,3 87,11 85.5,11 84.5,10 81,10 80,11 79,11 78.5,10.5 74,10.5
M3C on Bottom Layer "Top Layer-M3C" (solid, remove dead copper, pour order 125): 61,17.5 61,24.5 65.5,24.5 66,25 67,25 68,24 71.5,24 72.5,25 74,25 74,17 72.5,17 71.5,18 68,18 67,17 66,17 65.5,17.5
M3B on Bottom Layer "Top Layer-M3B" (solid, remove dead copper, pour order 124): 61,10.5 61,17.5 65.5,17.5 66,17 67,17 68,18 71.5,18 72.5,17 74,17 74,11 72.5,11 71.5,10 68,10 67,11 66,11 65.5,10.5
M3A on Bottom Layer "Top Layer-M3A" (solid, remove dead copper, pour order 123): 61,3.5 65.5,3.5 66,3 67,3 68,4 71.5,4 72.5,3 74,3 74,11 72.5,11 71.5,10 68,10 67,11 66,11 65.5,10.5 61,10.5
M2C on Bottom Layer "Top Layer-M2C" (solid, remove dead copper, pour order 122): 48,24.5 52.5,24.5 53,25 54,25 55,24 58.5,24 59.5,25 61,25 61,17 59.5,17 58.5,18 55,18 54,17 53,17 52.5,17.5 48,17.5
M2B on Bottom Layer "Top Layer-M2B" (solid, remove dead copper, pour order 121): 48,10.5 48,17.5 52.5,17.5 53,17 54,17 55,18 58.5,18 59.5,17 61,17 61,11 59.5,11 58.5,10 55,10 54,11 53,11 52.5,10.5
M2A on Bottom Layer "Top Layer-M2A" (solid, remove dead copper, pour order 120): 48,3.5 52.5,3.5 53,3 54,3 55,4 58.5,4 59.5,3 61,3 61,11 59.5,11 58.5,10 55,10 54,11 53,11 52.5,10.5 48,10.5
M1C on Bottom Layer "Top Layer-M1C" (solid, remove dead copper, pour order 119): 35,17.5 39.5,17.5 40,17 41,17 42,18 45.5,18 46.5,17 48,17 48,25 46.5,25 45.5,24 42,24 41,25 40,25 39.5,24.5 35,24.5
M1B on Bottom Layer "Top Layer-M1B" (solid, remove dead copper, pour order 118): 35,10.5 39.5,10.5 40,11 41,11 42,10 45.5,10 46.5,11 48,11 48,17 46.5,17 45.5,18 42,18 41,17 40,17 39.5,17.5 35,17.5
16V_PC on Bottom Layer "Top Layer-No Net" (solid, remove dead copper, pour order 95): 14,36.5 23.5,36.5 25,35 25,31.5 27.5,31.5 27.5,40 30.5,40 30.5,28 17,28 13.5,31.5 12,31.5 12,34.5
Net19V_IN_1 on Bottom Layer "Top Layer-No Net" (solid, remove dead copper, pour order 89): 15,40 15,37.5 12,34.5 12,31.5 10,31.5 9.3,32.2 9.3,36.8 12.5,40
16V on Bottom Layer "Top Layer-No Net" (solid, remove dead copper, pour order 100): 100,32 100,26 35.5,26 35.5,32 100,32
GND on Bottom Layer "Top Layer-No Net" (solid, remove dead copper, pour order 97): 100,40 35.5,40 35.5,32 100,32 100,40
5V on Bottom Layer "Bottom Layer-5V" (solid, remove dead copper, pour order 94): 7.2,26.196 9.2,27.4 9.2,30.3 6.5,31.8 3.5,31.8 1.3,30.5 1.3,27.5 3.5,26.196

## Keep-outs
Keep-Out Layer:
  the board outline again, w0.2

## Silkscreen, mask and mechanical layers (free items; w line width, h text height)
Top Overlay:
  text "-" at 18.3,37 h1.2
  text "PC" at 30.1,36.9 h0.8
  text "-" at 33.5,36.6 h1.2
  text "19V" at 13.7,35.7 h1.2
  text "16V" at 20.6,35.7 h1.2
  text "+" at 28,29.8 h1.2
  text "+" at 22.3,8.8 h1.2
  text "v0.2" at 28.5,3 h1.6
Mechanical 1:
  lines w0.2: 26.9,0 26.9,18 30.5,18 30.5,30.9 35.7,30.9 35.7,0